# Altium PCB Board.PcbDoc
Units mil, origin at the board's own origin, x right, y up, seen from the top; angles counter-clockwise.
Board outline 4090 x 3385 mil, 4 copper layers (Top Layer, GND, +5V, Bottom Layer), stack 13.956 mil thick; 33 components, 79 nets, 301 pads, 253 vias.
Unrouted connection lines stored in the file: 77.
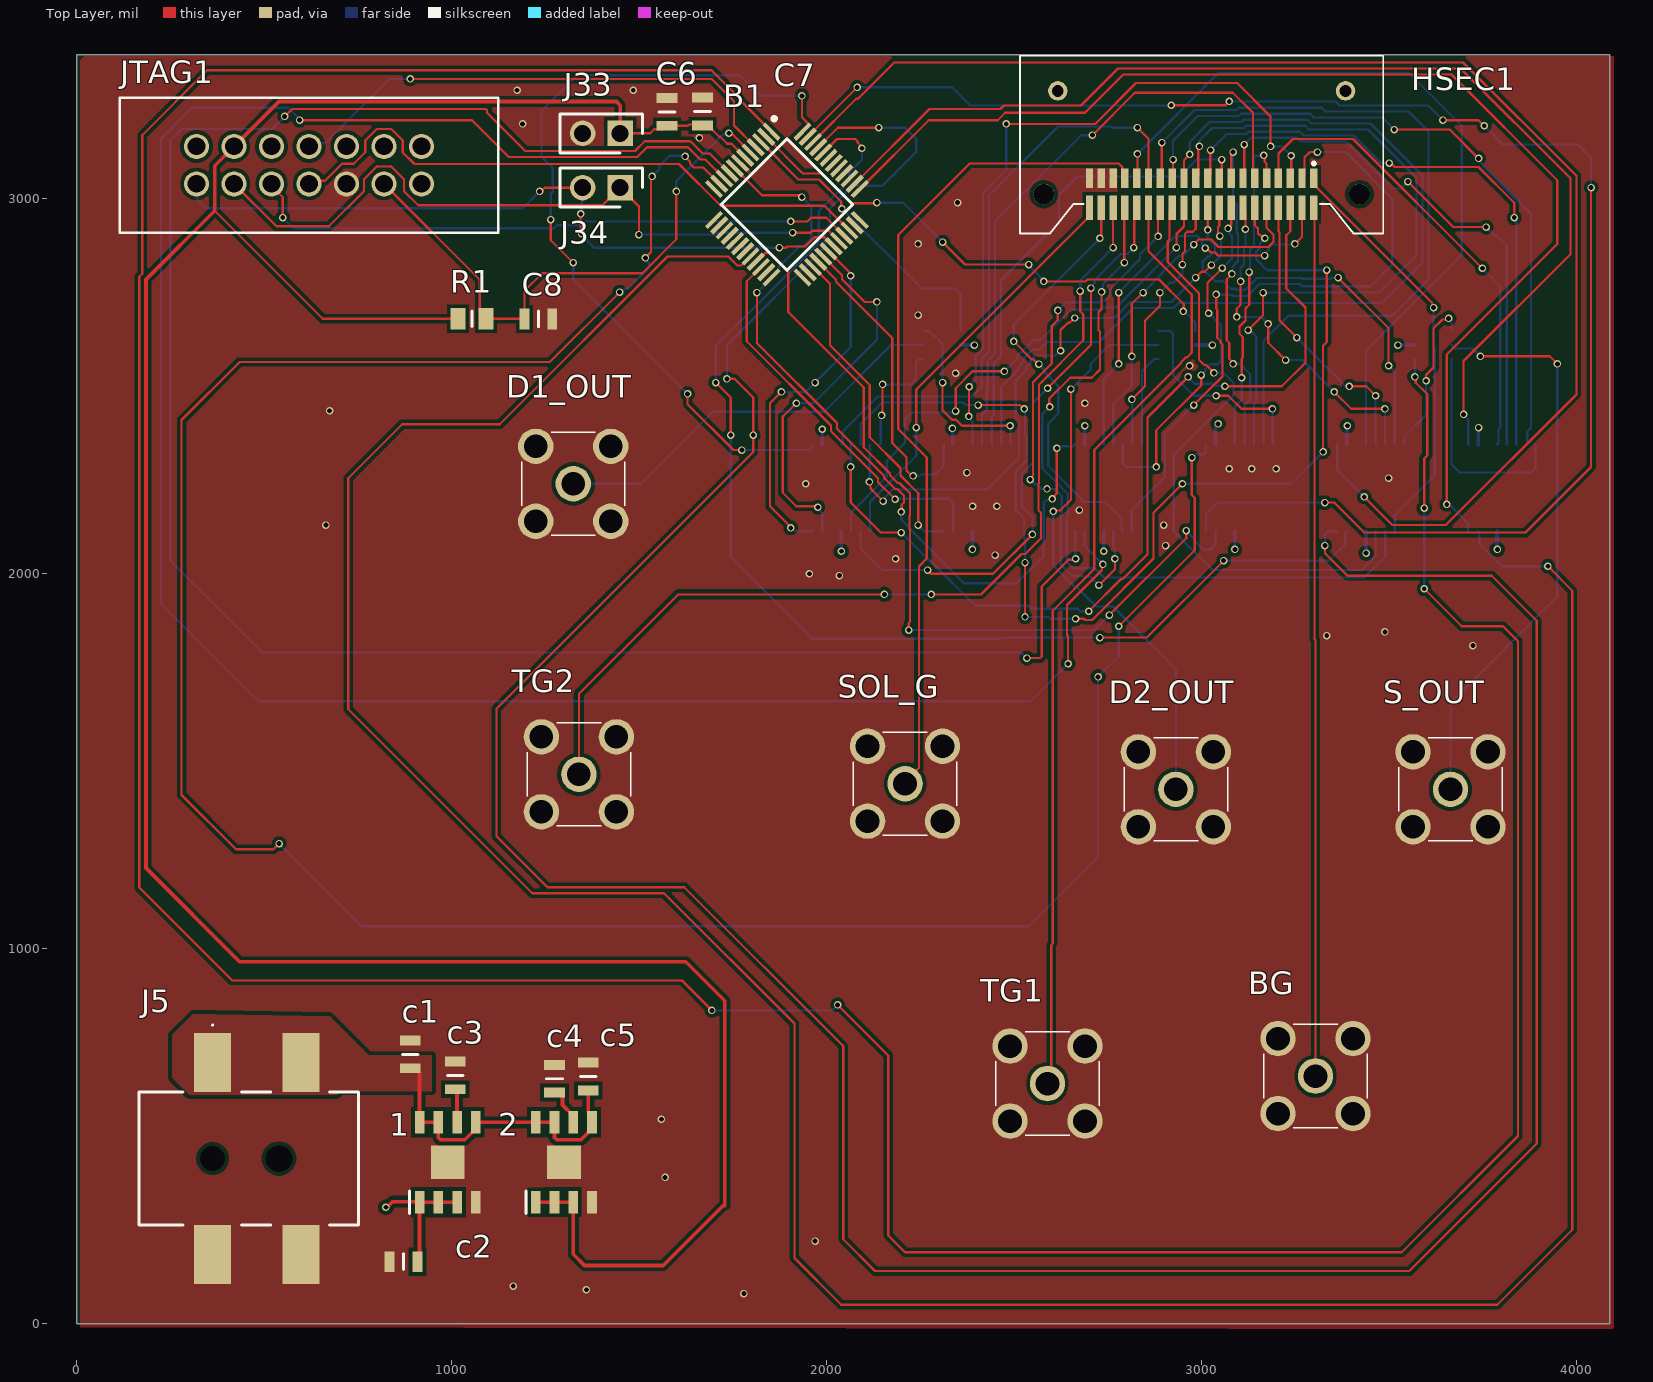
[diagram p0: Top Layer view]
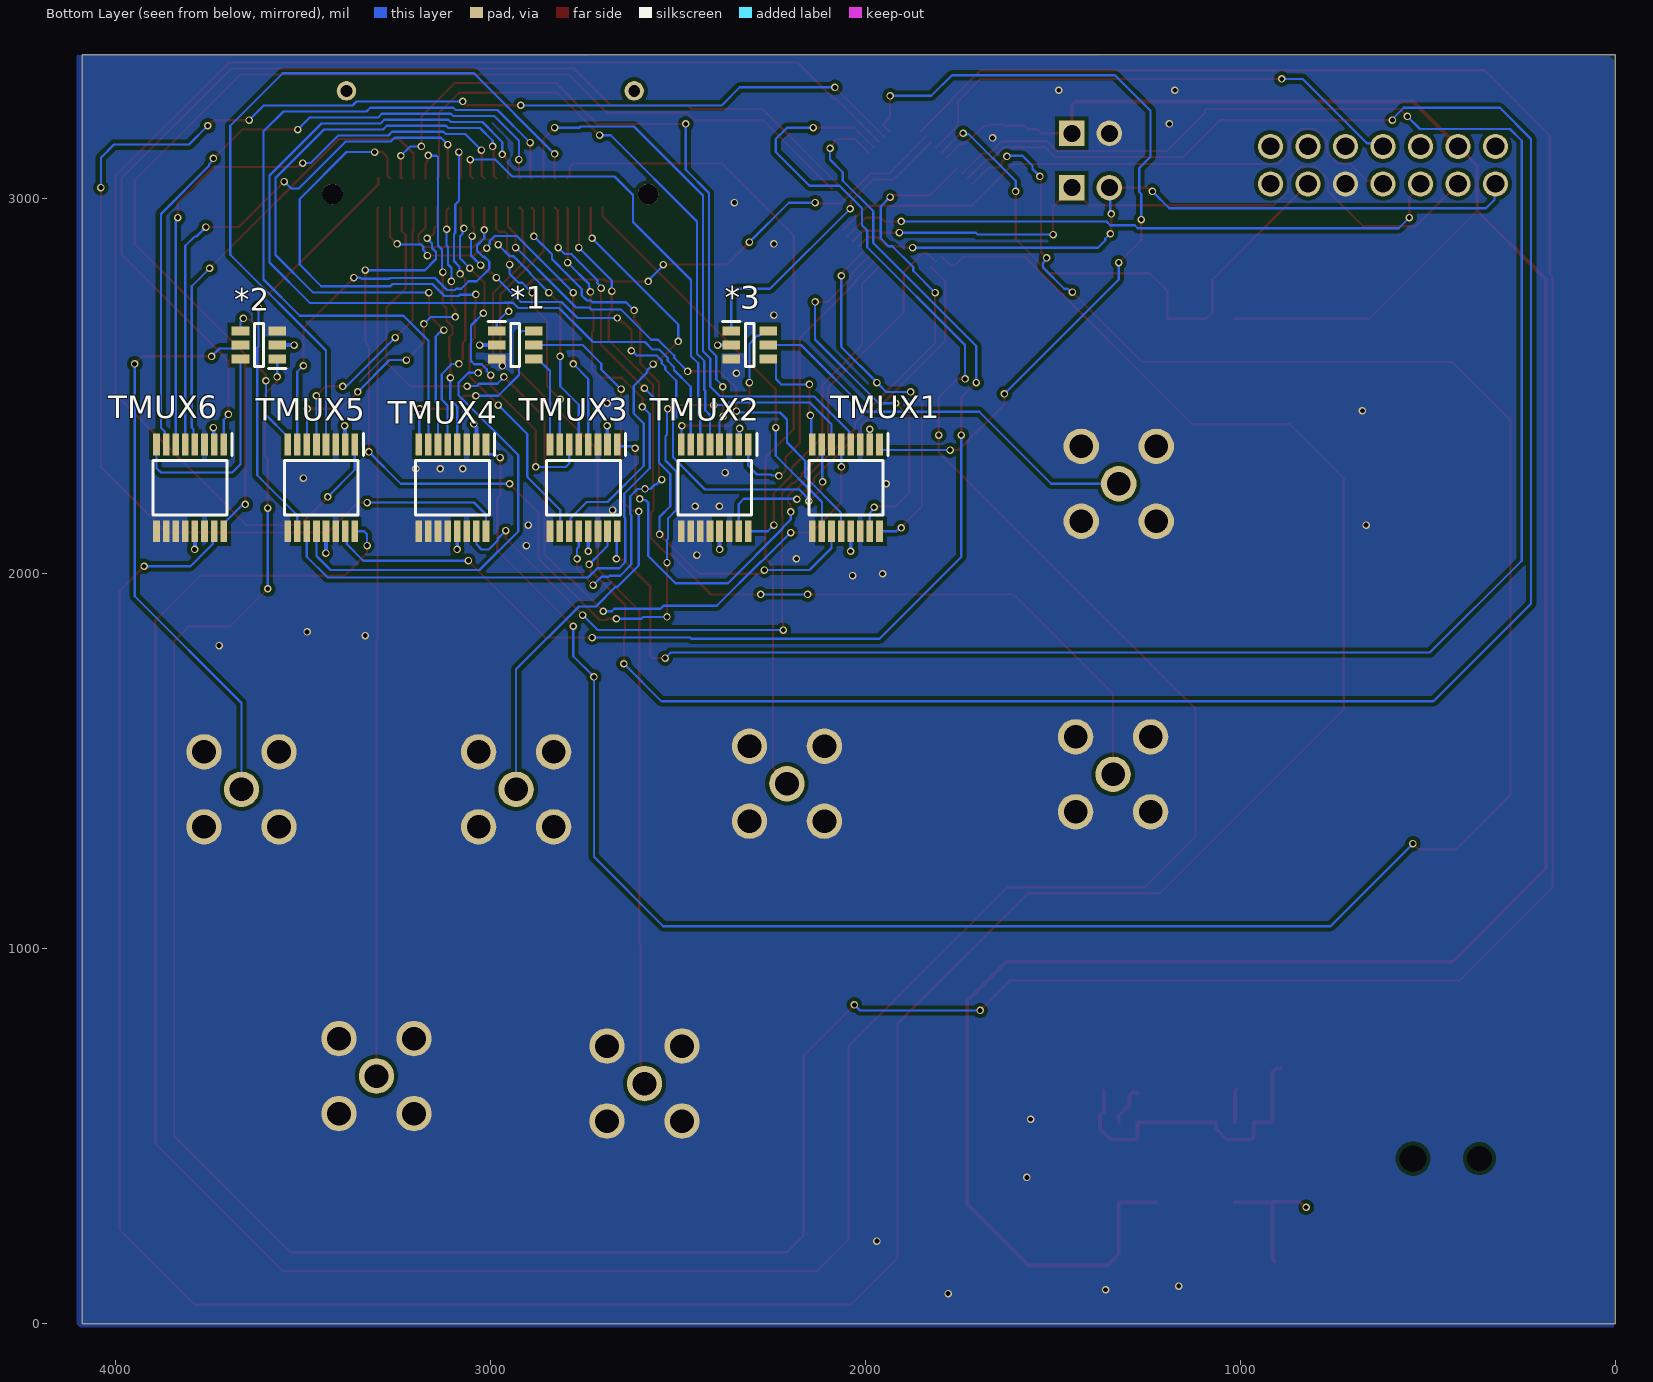
[diagram p1: Bottom Layer view, seen from below]
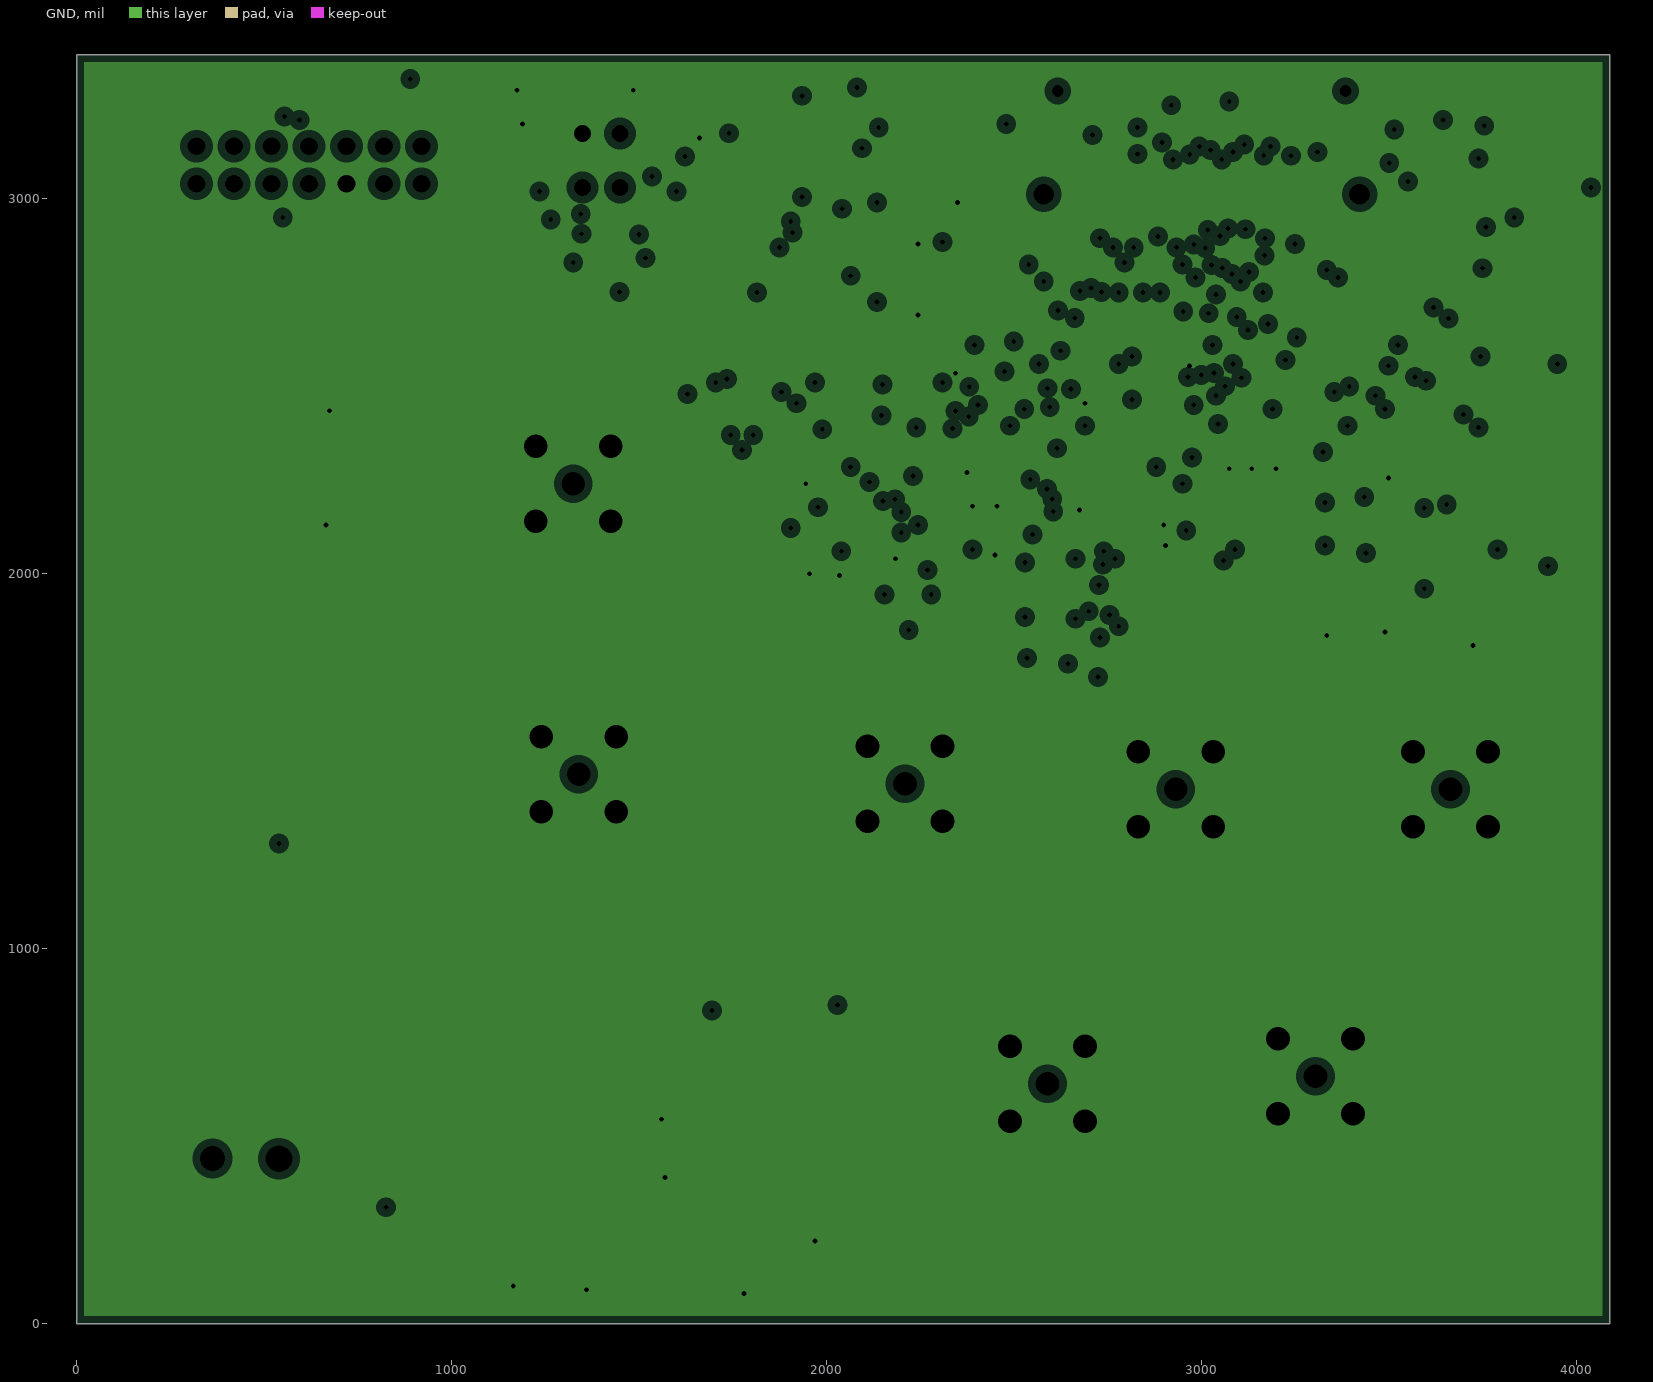
[diagram p2: GND, clearances drawn from the general rule]
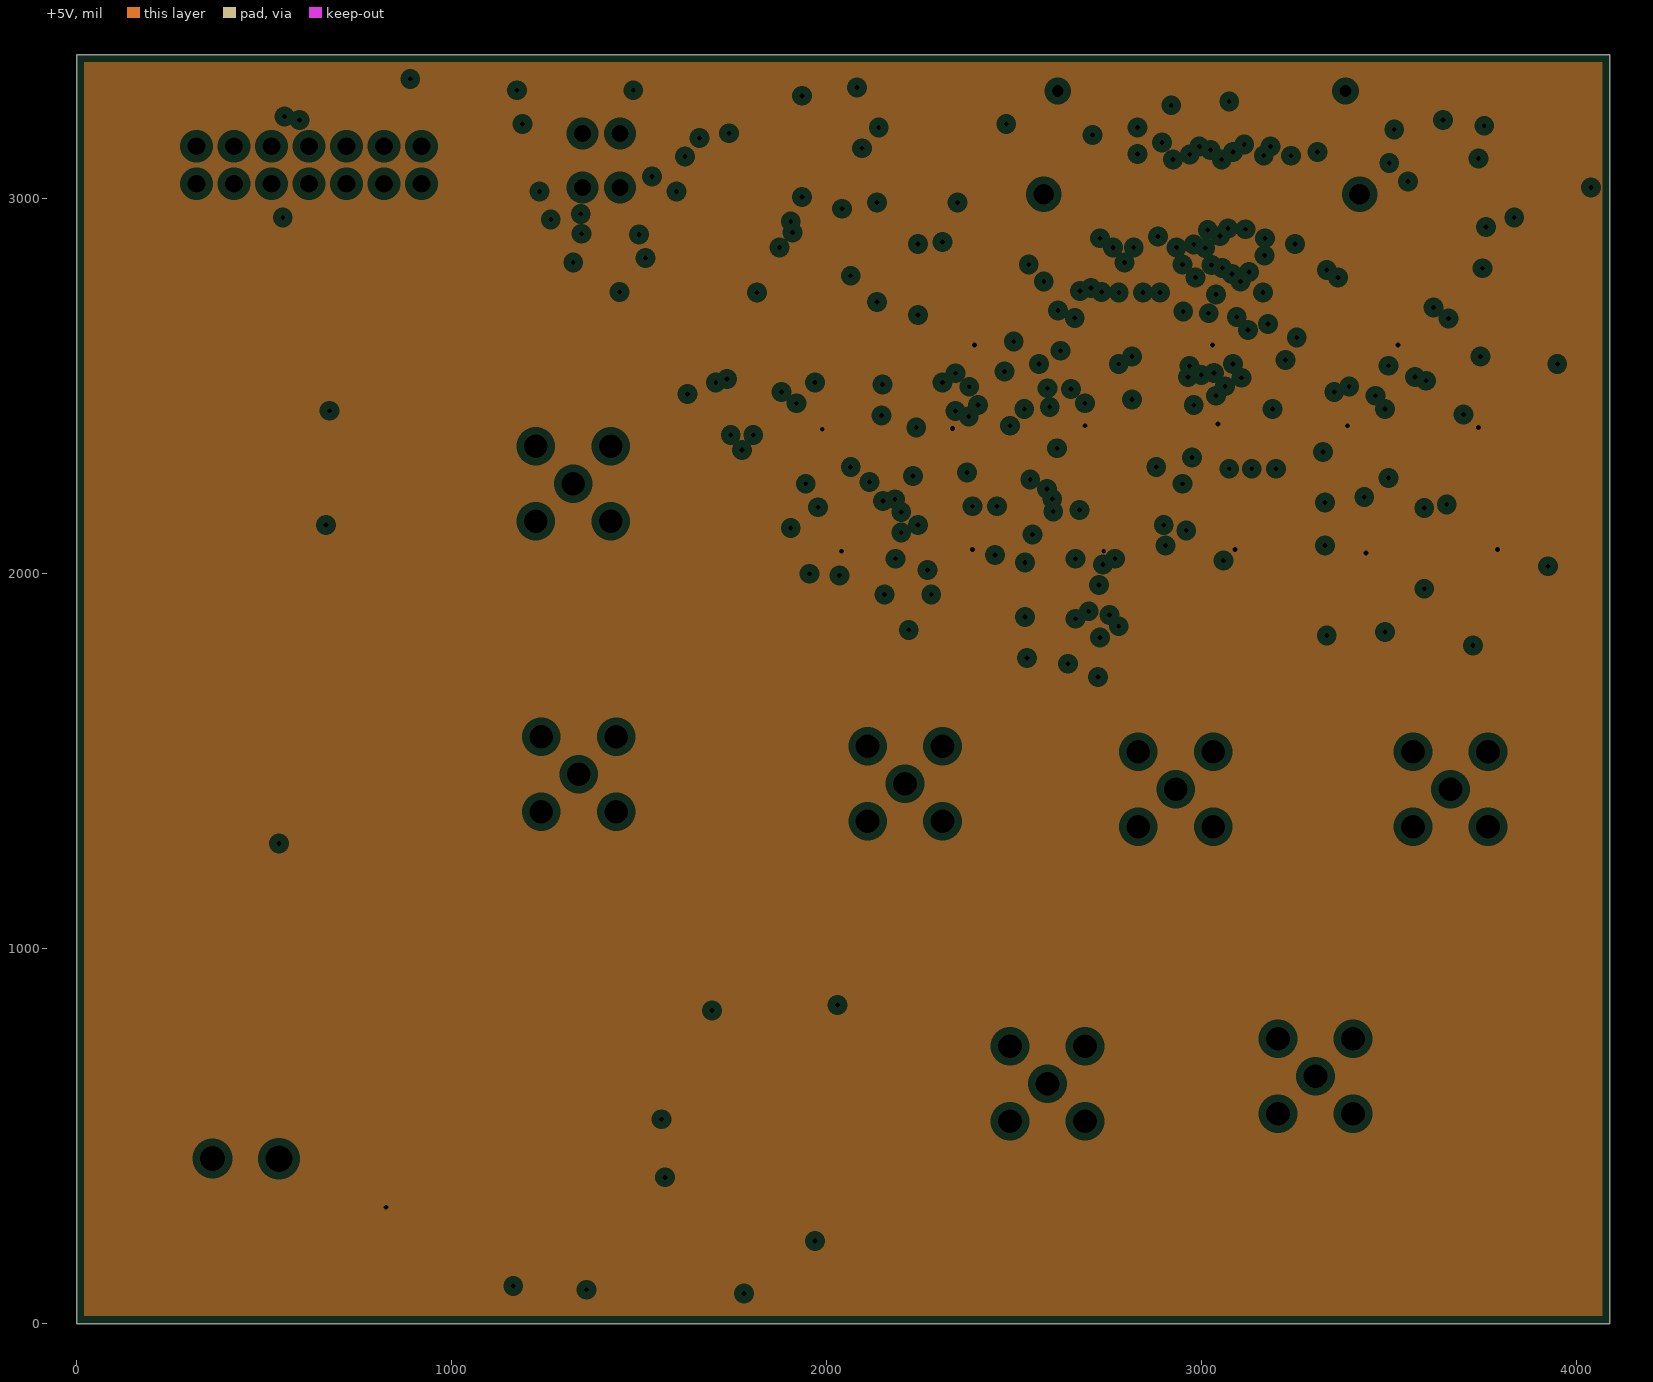
[diagram p3: +5V, clearances drawn from the general rule]

## Layer stack, top to bottom
Top Solder: solder mask 0.4, Solder Resist, Dk 3.5
Top Layer: signal copper 1.4
Dielectric 1: prepreg 2.8, PP-006, Dk 4.1
GND: plane copper 1.378, net GND
Dielectric 2: prepreg 2.8, PP-006, Dk 4.1
+5V: plane copper 1.378, net +5
Dielectric 3: prepreg 2.8, PP-006, Dk 4.1
Bottom Layer: signal copper 1.4
Bottom Solder: solder mask 0.4, Solder Resist, Dk 3.5

## Board outline
0,0 4090,0 4090,3385 0,3385

## Design rules (kind name [scope] priority, off if disabled: settings)
Clearance [All] p1: gap=10 ignorepadtopadclearanceinfootprint=TRUE
MinimumSolderMaskSliver [All] p1: minsoldermaskwidth=2
PlaneClearance [All] p1: clearance=20
PlaneConnect [All] p1: planeconnectstyle=Relief reliefexpansion=20 reliefentries=4 reliefconductorwidth=10 reliefairgap=10
PolygonConnect [All] p1: connectstyle=Direct reliefconductorwidth=10 reliefentries=4 polygonreliefangle="90 Angle" airgapwidth=10
RoutingVias [All] p1: holewidth=1 width=50 viastyle="Through Hole" minholewidth=1 minwidth=1 maxholewidth=100 maxwidth=100
SilkToSolderMaskClearance [IsPad] p1: minsilkscreentomaskgap=3 clearancetoexposedcopper=TRUE
SolderMaskExpansion [All] p1: expansion=4 istentingtop=FALSE
Width [All] p1: maxlimit=10 minlimit=6 preferedwidth=10 minimp=50.000000 maximp=50.000000 favimp=50.000000
26 further rules are at their usual default settings.

## Classes and differential pairs
component class SMA: 1 2 *1 *2 *3 BG c1 c2 c3 c4 c5 D1_OUT D2_OUT HSEC1 J5 S_OUT SOL_G TG1 TG2 TMUX1 TMUX2 TMUX3 TMUX4 TMUX5 TMUX6
component class MCU: B1 C6 C7 C8 J33 J34 JTAG1 R1

## Components (designator, comment, footprint, x,y, rotation, side; value= is the part's Value field where it differs from the comment)
1 "ADP7118ARDZ-5.0-R7" ADP7118ARDZ-5.0-R7 535,245 r90 top
2 "ADP7118ARDZ-3.3-R7" ADP7118ARDZ-5.0-R7 845,245 r90 top
*1 "TMUX1119" TMUX1119DBVR 2765,2705 r180 bottom
*2 "TMUX1119" TMUX1119DBVR 3788.62,2515 r0 bottom
*3 "TMUX1119" TMUX1119DBVR 2139.21,2705 r180 bottom (schematic designator *)
B1 "MSP430FR2355TPT" QFP50P900X900X160-48N 1895,2985 r315 top
BG "SMA-J-P-H-ST-TH1" SMAJPHSTTH1 3305,660 r0 top
c1 "2.2u" 0805X7R106KT1AT -2555,-12482.01 r270 top
c2 "2.2u" 0805X7R106KT1AT 14072.01,-3280 r0 top
c3 "2.2u" 0805X7R106KT1AT -2435,-12537.99 r270 top
c4 "2.2u" 0805X7R106KT1AT -2170,-12547.01 r270 top
c5 "2.2u" 0805X7R106KT1AT -2080,-12540.99 r270 top
C6 "100n" 0805X7R106KT1AT 5020,16432.01 r90 top
C7 "10u" 0805X7R106KT1AT 5115,16432.99 r90 top
C8 "1n" 0805X7R106KT1AT 14432.01,-765 r0 top
D1_OUT "SMA-J-P-H-ST-TH1" SMAJPHSTTH1 1325,2240 r0 top
D2_OUT "SMA-J-P-H-ST-TH1" SMAJPHSTTH1 2932.5,1425 r0 top
HSEC1 "HSEC8-120-01-S-RA-TR" SAMTEC_HSEC8-120-01-L-RA 3001.26,3015.63 r180 top
J5 "PJ-002AH-SMT-TR" PWRPJ 504.29,360 r270 top
J33 "M20-9990246" M20-9990246 1765,2960 r180 top
J34 "M20-9990246" M20-9990246 1765,2815 r180 top
JTAG1 "302-S14" CONN_7024614xx_MOL 320,3040 r0 top
R1 "47k" CR0805-FX-1543ELF 3115,1220 r0 top
S_OUT "SMA-J-P-H-ST-TH1" SMAJPHSTTH1 3665,1425 r0 top
SOL_G "SMA-J-P-H-ST-TH1" SMAJPHSTTH1 2210,1440 r0 top
TG1 "SMA-J-P-H-ST-TH1" SMAJPHSTTH1 2590,640 r0 top
TG2 "SMA-J-P-H-ST-TH1" SMAJPHSTTH1 1340,1465 r0 top
TMUX1 "TMUX1108PWR" TMUX1108PWR 1822.8,2859.33 r270 bottom
TMUX2 "TMUX1108PWR" TMUX1108PWR 2172.68,2859.33 r270 bottom
TMUX3 "TMUX1108PWR" TMUX1108PWR 2522.56,2859.33 r270 bottom
TMUX4 "TMUX1108PWR" TMUX1108PWR 2872.44,2859.33 r270 bottom
TMUX5 "TMUX1108PWR" TMUX1108PWR 3222.32,2859.33 r270 bottom
TMUX6 "TMUX1108PWR" TMUX1108PWR 3572.2,2859.33 r270 bottom

## Footprints (in the part's own frame and the unit in brackets; to place one, negate y for a bottom-side part, rotate by r counter-clockwise, add the part's x,y. Pads: shape width x height; smd on the part's side, far side on the other; paste and mask are expansions set on the pad)
0805X7R106KT1AT [mm]
  rect 0.67x1.41 smd: 1(-336.22,87.503) 2(-334.34,87.503)
  silkscreen extent -335.28,86.97 -335.28,88.04, body extent -336.28,86.87 -334.28,88.14, height 1.13
ADP7118ARDZ-5.0-R7 [mm]
  rect 1.525x0.65 smd: 1(1.987,-9.652) 2(1.987,-10.922) 3(1.987,-12.192) 4(1.987,-13.462) 5(7.411,-13.462) 6(7.411,-12.192) 7(7.411,-10.922) 8(7.411,-9.652)
  rect 2.29x2.29 smd: 9(4.699,-11.557)
  silkscreen extent 1.22,-8.98 2.75,-8.98, body extent 1.7,-13.97 7.7,-9.07, height 0.85
CONN_7024614xx_MOL [mil]
  round 67 / inner round 60 / far side round 67 hole 47 paste-33.5 mask+0: 1(0,0) 2(0,100) 3(100,0) 4(100,100) 5(200,0) 6(200,100) 7(300,0) 8(300,100) 9(400,0) 10(400,100) 11(500,0) 12(500,100) 13(600,0) 14(600,100)
  silkscreen extent -205,-130 805,230, body extent -205,-125 795,225, height 280
CR0805-FX-1543ELF [mm]
  rect 1x1.45 smd: 1(-53.274,37.084) 2(-51.374,37.084)
  silkscreen extent -52.32,36.56 -52.32,37.61, body extent -53.32,36.46 -51.32,37.71, height 0.6
M20-9990246 [mm]
  rect 1.725x1.725 / inner round 1.725 / far side rect 1.725x1.725 hole 1.15: 1(8.001,-5.461)
  round 1.725 hole 1.15: 2(10.541,-5.461)
  silkscreen extent 6.48,-6.78 12.06,-4.14
PWRPJ [mm]
  rect 4x2.5 smd: 1(-8.532,-3.593) 2(4.468,-3.593) 3(4.468,2.407) A1(-8.532,2.407)
  round 0.85 hole 1.7 unplated: MH1(-2.032,-3.593)
  round 0.9 hole 1.8 unplated: MH2(-2.032,0.907)
  silkscreen extent -11.13,-8.59 2.47,6.31, body extent -8.26,-8.49 4.34,6.41, height 10.98
QFP50P900X900X160-48N [mm]
  rect 1.475x0.3 smd: 1(-4.238,2.75) 2(-4.238,2.25) 3(-4.238,1.75) 4(-4.238,1.25) 5(-4.238,0.75) 6(-4.238,0.25) 7(-4.238,-0.25) 8(-4.238,-0.75) 9(-4.238,-1.25) 10(-4.238,-1.75) 11(-4.238,-2.25) 12(-4.238,-2.75) 25(4.238,-2.75) 26(4.238,-2.25) 27(4.238,-1.75) 28(4.238,-1.25) 29(4.238,-0.75) 30(4.238,-0.25) 31(4.238,0.25) 32(4.238,0.75) 33(4.238,1.25) 34(4.238,1.75) 35(4.238,2.25) 36(4.238,2.75)
  rect 0.3x1.475 smd: 13(-2.75,-4.238) 14(-2.25,-4.238) 15(-1.75,-4.238) 16(-1.25,-4.238) 17(-0.75,-4.238) 18(-0.25,-4.238) 19(0.25,-4.238) 20(0.75,-4.238) 21(1.25,-4.238) 22(1.75,-4.238) 23(2.25,-4.238) 24(2.75,-4.238) 37(2.75,4.238) 38(2.25,4.238) 39(1.75,4.238) 40(1.25,4.238) 41(0.75,4.238) 42(0.25,4.238) 43(-0.25,4.238) 44(-0.75,4.238) 45(-1.25,4.238) 46(-1.75,4.238) 47(-2.25,4.238) 48(-2.75,4.238)
  silkscreen extent -4.85,-3.15 3.15,3.62, body extent -4.5,-4.5 4.5,4.5, height 1.6
SAMTEC_HSEC8-120-01-L-RA [mm]
  rect 0.5x1.35 smd: 1(-7.6,-1) 3(-6.8,-1) 5(-6,-1) 7(-5.2,-1) 9(-4.4,-1) 11(-3.6,-1) 13(-2.8,-1) 15(-2,-1) 17(-1.2,-1) 19(-0.4,-1) 21(0.4,-1) 23(1.2,-1) 25(2,-1) 27(2.8,-1) 29(3.6,-1) 31(4.4,-1) 33(5.2,-1) 35(6,-1) 37(6.8,-1) 39(7.6,-1)
  rect 0.5x1.65 smd: 2(-7.6,1) 4(-6.8,1) 6(-6,1) 8(-5.2,1) 10(-4.4,1) 12(-3.6,1) 14(-2.8,1) 16(-2,1) 18(-1.2,1) 20(-0.4,1) 22(0.4,1) 24(1.2,1) 26(2,1) 28(2.8,1) 30(3.6,1) 32(4.4,1) 34(5.2,1) 36(6,1) 38(6.8,1) 40(7.6,1)
  round 1.318 hole 0.81: P1(-9.75,-6.925) P2(9.75,-6.925)
  round 1.4 hole 1.4 unplated: ""(-10.7,0.075) ""(10.7,0.075)
  silkscreen extent -12.3,-9.3 12.3,2.75, body extent -12.3,-9.32 12.3,2.73, height 5.15
SMAJPHSTTH1 [mm]
  round 2.4 hole 1.6: 1(0,0) 2(-2.54,2.54) 3(-2.54,-2.54) 4(2.54,-2.54) 5(2.54,2.54)
  silkscreen extent -3.5,-3.5 3.5,3.5, body extent -3.44,-3.5 3.56,3.5, height 9.55
TMUX1108PWR [mm]
  rect 1.475x0.45 smd: 1(13.064,-3.567) 2(13.064,-4.217) 3(13.064,-4.867) 4(13.064,-5.517) 5(13.064,-6.167) 6(13.064,-6.817) 7(13.064,-7.467) 8(13.064,-8.117) 9(18.94,-8.117) 10(18.94,-7.467) 11(18.94,-6.817) 12(18.94,-6.167) 13(18.94,-5.517) 14(18.94,-4.867) 15(18.94,-4.217) 16(18.94,-3.567)
  silkscreen extent 12.33,-8.34 17.85,-2.99, body extent 12.8,-8.34 19.2,-3.34, height 1.13
TMUX1119DBVR [mm]
  rect 1.2x0.6 smd: 1(-5.568,-1.463) 2(-5.568,-2.413) 3(-5.568,-3.363) 4(-3.068,-3.363) 5(-3.068,-2.413) 6(-3.068,-1.463)
  silkscreen extent -6.17,-3.86 -4.02,-0.81, body extent -5.72,-3.86 -2.92,-0.96, height 1.2

## Part data
2: library part ADP7118ARDZ-5.0-R7
B1: "16-bit Microcontrollers - MCU 24MHz 105C ULP Microcontroller With 32 KB FRAM, 4 KB SRAM, 44 IO, 12-bit ADC, 12-bit DACs, OpAmp/PGA 48-LQFP -40 to 105", Manufacturer_Name="Texas Instruments", Mouser Part Number=595-MSP430FR2355TPT, Datasheet Link=https://datasheet.datasheetarchive.com/originals/distributors/DKDS41/DSANUWW0029426.pdf, Geometry.Height=1.6mm, Manufacturer_Part_Number=MSP430FR2355TPT, Mouser Price/Stock=https://www.mouser.co.uk/ProductDetail/Texas-Instruments/MSP430FR2355TPT?qs=gTYE2QTfZfTjQOKK%2F%2Fw59A%3D%3D
BG D1_OUT D2_OUT S_OUT SOL_G TG1 TG2: "SAMTEC - SMA-J-P-H-ST-TH1 - RF COAXIAL, SMA JACK, 50 OHM, PCB", Manufacturer_Name=SAMTEC, Mouser Part Number=200-SMAJPHSTTH1, Datasheet Link=http://suddendocs.samtec.com/prints/sma-j-p-x-st-th1-mkt.pdf, Geometry.Height=9.55mm, Manufacturer_Part_Number=SMA-J-P-H-ST-TH1, Mouser Price/Stock=https://www.mouser.co.uk/ProductDetail/Samtec/SMA-J-P-H-ST-TH1?qs=bkXRl3BLxbHdaAB2Qwy6zw%3D%3D
c1 c2 c3 c4 c5 C6 C7 C8: library part capacitor
J5: library part Powerinput
JTAG1: library part JTAG
R1: library part resistor

## Via types
v1: diameter 20, hole 13, Top Layer to Bottom Layer, tented both sides, 253 vias

## Nets (pads, with @x,y where several pads share a name; then routed paths per layer and width w, separated by ;. In a path a pad name is that pad's centre, name@x,y a point inside that pad or via, vN(x,y) a via of type N, cw(c..) or ccw(c..) an arc to the next point about the centre after c; other vN are vias at no path point)
3.3V: 2.1 2.2 2.3 B1.6 C6.1 C7.1 J33.1 JTAG1.4 R1.1 | length 7288.5
  Top Layer w6: 368.5,2968.5 657,2680 R1.1 ; J33.1 1530.43,3175 1541.32,3185.88 1565.88,3185.88 C6.1 1630.44,3195 1634.17,3198.73 1667.26,3198.73 C7.1 1684.57,3195.98 1714.49,3166.06 1717,3166.06 1717,3165.47 1735.56,3146.91 1747.01,3146.91 B1.6
  Top Layer w10: 2.1 2.2 2.3 1325,185 1355,155 1565,155 1725,315 1729.14,315 1729.14,860.86 1625,965 435,965 185,1215 185,2785 368.5,2968.5 368.5,3088.5 JTAG1.4 540,3260 1440,3260 1450,3250 J33.1
+5: 1.1 1.2 1.3 *1.2 *2.2 *3.2 c2.2 TMUX1.2 TMUX1.13 TMUX2.2 TMUX2.13 TMUX3.2 TMUX3.13 TMUX4.2 TMUX4.13 TMUX5.2 TMUX5.13 TMUX6.2 TMUX6.13 | length 1086.5
  Top Layer w10: v1(825,310) 827.71,310 842.71,325 913.23,325 1.1 ; c2.2 915,170.98 1.1 ; 1.3 1.2 1.1
  Bottom Layer w10: TMUX1.2 1989.01,2345.19 1989.01,2385.37 v1(1989.21,2385.56) ; v1(2040,2060) TMUX1.13 ; v1(2336.29,2388) 2337.49,2386.79 2337.49,2346.21 TMUX2.2 ; *3.2 v1(2395,2610) ; TMUX2.13 v1(2389.88,2065.12) v1@2390,2065 ; TMUX3.2 2689.29,2345.71 2689.29,2394.29 v1(2690,2395) ; TMUX3.13 2739.88,2113.54 2739.88,2060.12 v1(2740,2060) ; *1.2 v1(3029.89,2609.97) ; TMUX4.2 3038.46,2390.76 3045,2397.29 v1(3045,2400) ; TMUX4.13 3089.65,2065.35 v1(3090,2065) ; TMUX5.2 3389.17,2345.83 3389.17,2394.17 v1(3390,2395) ; TMUX5.13 3439.76,2113.43 3439.76,2055.24 v1(3440,2055) ; v1(3525,2610) *2.2 ; TMUX6.2 3739.11,2345.89 3739.11,2389.11 v1(3740,2390) ; TMUX6.13 3789.41,2065.59 v1(3790,2065)
BG: BG.1 HSEC1.2 | length 2318.1
  Top Layer w6: HSEC1.2 3302,2974.73 3302,1825.33 3305,1822.33 BG.1
D1-1: HSEC1.29 TMUX1.4 | length 1594.8
  Top Layer w6: v1(2830,3190) 2859.53,3160.47 HSEC1.29
  Bottom Layer w6: TMUX1.4 2043.73,2348.73 2043.73,2379.42 2137.31,2473 2388.05,2473 2414.71,2499.66 2414.71,2574.56 2434,2593.85 2434,3009 2618,3193 2760.5,3193 2763.5,3190 v1(2830,3190)
D1-2: HSEC1.4 TMUX3.4 | length 1106.7
  Top Layer w6: v1(2780,2560) 2780,2750 v1(2780.14,2750.14) ; v1(3010.91,2868.6) 3014.49,2868.6 3026.13,2856.95 3036.95,2856.95 3044.9,2849 v1(3169.36,2849) ; v1(3250,2880) 3268.98,2898.98 HSEC1.4
  Bottom Layer w6: TMUX3.4 2739.76,2519.76 v1(2780,2560) ; v1(2780.14,2750.14) 2931,2901 2989.53,2901 3003,2887.53 3003,2880.29 3010.91,2872.39 v1(3010.91,2868.6) ; v1(3169.36,2849) 3169.36,2852.79 3180.53,2863.95 3180.53,2873 3186.21,2878.68 3248.68,2878.68 v1(3250,2880)
D1_OUT: *3.5 D1_OUT.1 | length 1088.3
  Bottom Layer w6: D1_OUT.1 1505,2240 1697,2432 1994.63,2432 2172.63,2610 *3.5
D2-1: HSEC1.6 TMUX1.5 | length 2436.3
  Top Layer w6: v1(2065,2285) 2065,2190 2145,2110 v1(2200,2110) ; v1(2699.9,1899.95) 2786.05,1986.1 2791.1,1986.1 2857,2052 2857,2417 v1(2965,2525) ; v1(3063.15,2500.14) 3063.29,2500 3215,2500 3278,2563 3278,2710.19 3227,2761.19 3227,2903.39 3237.48,2913.87 HSEC1.6
  Bottom Layer w6: v1(2065,2285) 2065.3,2285.3 2065.3,2344.7 TMUX1.5 ; v1(2200,2110) 2277,2033 2279.53,2033 2397.53,1915 2539.29,1915 2547.29,1907 2670.53,1907 2677.58,1899.95 v1(2699.9,1899.95) ; v1(2965,2525) 2983,2507 3030.63,2507 3036.49,2501.14 3062.15,2501.14 v1(3063.15,2500.14)
D2-2: HSEC1.10 TMUX3.5 | length 958.2
  Top Layer w6: v1(2815,2580) 2815,2720 v1(2845,2750) ; v1(2980,2878) 2993.6,2891.6 3026.88,2891.6 3046.47,2872 3179.53,2872 3193,2885.47 3193,2904.53 3174.49,2923.04 HSEC1.10
  Bottom Layer w6: TMUX3.5 2765.35,2450.69 2815,2500.34 v1(2815,2580) ; v1(2845,2750) 2895.02,2800.02 2895.02,2802.44 2939.58,2847 2943.53,2847 2944.47,2847.95 2949.95,2847.95 v1(2980,2878)
D2_OUT: *1.5 D2_OUT.1 | length 1552.2
  Top Layer w6: v1(2605.35,2166.44) 2608.03,2169.12 2624.12,2169.12 2652.58,2197.58 v1(2652.58,2492.42)
  Bottom Layer w6: v1(2605.35,2166.44) 2605.35,2021.87 2662.11,1965.11 2667.26,1965.11 2719.37,1913 2764.53,1913 2932.5,1745.03 D2_OUT.1 ; v1(2652.58,2492.42) 2705.13,2544.97 2705.13,2560.13 2755,2610 *1.5
D3-1: HSEC1.12 TMUX1.6 | length 3008.2
  Top Layer w6: v1(2405,2450) 2516.21,2450 2526.21,2440 v1(2528.05,2440) ; v1(2530,1885) v1(2530,2030) ; v1(2665,1880) 2687.32,1880 2690.37,1876.95 2709.42,1876.95 2873,2040.53 2873,2163 v1(2950,2240) ; HSEC1.12 3142.99,2930 3151.65,2921.35 3151.65,2907.76 3155.16,2904.24 3156.97,2904.24 3166.21,2895 v1(3170,2895) ; v1(3325,2325) 3325,2608.11 3335,2618.11 v1(3335,2810)
  Bottom Layer w6: TMUX1.6 2091.18,2398.71 2149.47,2457 2364.84,2457 2371.84,2450 v1(2405,2450) ; v1(2528.05,2440) 2530.1,2437.95 2530.1,2371 2534,2367.1 2534,2301.99 2505.05,2273.04 2505.05,2170.05 2527,2148.1 2527,2093.78 2530,2090.78 v1(2530,2030) ; v1(2530,1885) 2593.66,1885 2598.66,1880 v1(2665,1880) ; v1(2950,2240) 3240,2240 v1(3325,2325) ; v1(3170,2895) 3170,2894.13 3157,2881.13 3157,2869.16 3146.36,2858.53 3146.36,2839.47 3175.84,2810 v1(3335,2810)
D3-2: HSEC1.16 TMUX3.6 | length 967.9
  Top Layer w6: v1(2880,2285) 2880,2382.53 3000,2502.53 v1(3000,2530) ; v1(3020,2695) 3017,2698 3017,2776.1 v1(3056.19,2815.29) ; v1(3072,2921.4) 3072,2923.79 3080,2931.79 HSEC1.16
  Bottom Layer w6: TMUX3.6 2790.94,2294.06 2800,2285 v1(2880,2285) ; v1(3000,2530) 3000.46,2530 3010.98,2540.51 3010.98,2545.55 3024.45,2559.02 3044.02,2559.02 3052.89,2567.89 3052.89,2662.11 v1(3020,2695) ; v1(3056.19,2815.29) 3082.36,2841.46 3082.36,2899.74 3074.68,2907.42 3074.68,2918.72 v1(3072,2921.4)
D4-1: HSEC1.18 TMUX1.7 | length 1648.4
  Top Layer w6: v1(2115,2245) 2117.68,2242.32 2117.68,2227.32 2135.78,2209.22 v1(2151.34,2193.66) ; v1(2625,2595) 2625,2650 2644.44,2669.44 2648.69,2669.44 2661.55,2682.3 v1(2662.7,2682.3) ; v1(2985,2790) 3000.89,2805.89 3009.6,2805.89 v1(3027.38,2823.67) ; HSEC1.18 3048.5,2928.5 3045,2925 3045,2906 v1(3050,2901)
  Bottom Layer w6: v1(2115,2245) 2115.89,2245.89 2115.89,2344.11 TMUX1.7 ; v1(2151.34,2193.66) 2151.34,2197.45 2160.69,2206.79 2160.69,2208.21 2177.47,2225 2428.52,2225 2514.1,2310.58 2514.1,2408.21 2505.05,2417.26 2505.05,2514.9 2534.75,2544.6 2534.75,2552.12 2543.97,2561.34 2543.97,2569.08 2557.45,2582.55 2610.58,2582.55 2623.02,2595 v1(2625,2595) ; v1(2662.7,2682.3) 2768.93,2682.3 2811.63,2725 2920,2725 v1(2985,2790) ; v1(3027.38,2823.67) 3052.59,2848.87 3052.59,2898.41 v1(3050,2901)
D4-2: HSEC1.22 TMUX3.7 | length 717.2
  Top Layer w6: v1(2815,2465) 2850,2500 2850,2675 2890,2715 v1(2890,2750) ; v1(2950.05,2824.95) 2950.05,2853.53 2957,2860.47 2957,2907 2962.68,2912.68 2977.68,2912.68 2985.51,2920.51 HSEC1.22
  Bottom Layer w6: v1(2815,2465) 2815.77,2464.23 2815.77,2345.77 TMUX3.7 ; v1(2890,2750) 2916.34,2776.34 2926.34,2776.34 2950,2800 2950,2824.89 v1(2950.05,2824.95)
D5-1: HSEC1.24 TMUX1.12 | length 1425
  Top Layer w6: v1(2345,2434) 2345,2495 2390,2540 v1(2475,2540) ; v1(2934,2870) 2934,2906.63 2954.02,2926.64 HSEC1.24
  Bottom Layer w6: TMUX1.12 2065.59,2163.06 2161,2258.47 2161,2300.9 2210,2349.9 2210,2411.49 2228.51,2430 2335,2430 2339,2434 v1(2345,2434) ; v1(2475,2540) 2510.93,2575.93 2510.93,2581.3 2553.98,2624.34 2572.21,2624.34 2653.17,2705.3 2732.93,2705.3 2737.63,2710 2772.53,2710 2822,2759.47 2822,2759.53 2932.47,2870 v1(2934,2870)
D5-2: HSEC1.28 TMUX3.12 | length 1501.7
  Top Layer w6: v1(2544.05,2251.21) 2544.05,2254.73 2551.05,2261.73 2551.05,2511.1 2601.16,2561.21 2601.16,2661.16 2617.67,2677.67 v1(2617.67,2702.33) ; v1(2727.31,1969.69) 2770,2012.37 v1(2770,2040) ; v1(2885,2900) 2885,2970.24 HSEC1.28
  Bottom Layer w6: v1(2544.05,2251.21) 2544.55,2251.21 2557.73,2238.02 2561.98,2238.02 2573.79,2226.21 v1(2588.69,2226.21) 2608.86,2226.21 2628.35,2206.72 2628.35,2157.93 2625.13,2154.71 2625.13,2024.71 2654.85,1995 2683,1995 2686,1992 2705,1992 v1(2727.31,1969.69) ; v1(2617.67,2702.33) 2639.34,2724 2729,2724 2733.86,2728.86 2743.67,2728.86 2757.14,2742.34 2757.14,2759.67 2793.11,2795.63 2793.16,2795.63 2837.03,2839.5 2837.03,2852.03 v1(2885,2900) ; TMUX3.12 2765.35,2071.24 2770,2066.59 v1(2770,2040)
D6-1: HSEC1.32 TMUX1.11 | length 1596.3
  Top Layer w6: v1(2270,2010) 2280,2000 2444.85,2000 2549.85,2105 v1(2550,2105) ; v1(2590.05,2494.95) 2706,2610.9 v1(2706,2762.26) ; v1(2820,2870) 2821.19,2871.19 2821.19,2969.42 HSEC1.32
  Bottom Layer w6: TMUX1.11 2091.18,2068.82 2150,2010 v1(2270,2010) ; v1(2550,2105) 2550,2151.23 2521.05,2180.18 2521.05,2266.41 2551.05,2296.41 2551.05,2455.95 v1(2590.05,2494.95) ; v1(2706,2762.26) 2706,2766.05 2715.92,2775.98 2715.92,2783.45 2785.47,2853 2803,2853 v1(2820,2870)
D6-2: HSEC1.38 TMUX3.11 | length 1128.2
  Top Layer w6: v1(2500,2620) 2548.15,2571.85 2552.4,2571.85 2564.69,2559.55 v1(2566.97,2559.55) ; v1(2730,2895) 2733.54,2898.54 HSEC1.38
  Bottom Layer w6: 2500,2630 2500,2665 v1(2730,2895) ; v1(2566.97,2559.55) 2566.97,2558.15 2583.14,2541.98 2583.14,2536.86 2619,2501 2619,2427.74 2592,2400.74 2592,2288.33 2688.79,2191.54 2743.75,2191.54 2787.21,2148.08 2787.21,2117.39 TMUX3.11
D7-1: HSEC1.40 TMUX1.10 | length 1108.1
  Top Layer w6: v1(2240,2390) 2240,2491.57 2702.05,2953.62 HSEC1.40
  Bottom Layer w6: TMUX1.10 2120.5,2117.39 2116.77,2121.13 2116.77,2191.62 2240,2314.85 v1(2240,2390)
D7-2: HSEC1.3 TMUX3.10 | length 1776.4
  Top Layer w6: v1(2980,2450) 3037.64,2507.64 3038.13,2507.64 3056.98,2526.49 3056.98,2611.42 3051.97,2616.43 3051.97,2620.56 3043,2629.53 3043,2704.53 3040,2707.53 v1(3040,2745) ; HSEC1.3 3275.82,3061.84 3275.82,3110.82 3290,3125 v1(3310,3125)
  Bottom Layer w6: TMUX3.10 2815,2115.2 2815,2170 2903,2258 2903,2373 v1(2980,2450) ; v1(3040,2745) 3041,2744 3082.63,2744 3085.63,2741 3123.47,2741 3155.47,2773 3262,2773 3268,2767 3452,2767 3510,2825 3510,3000 3385,3125 v1(3310,3125)
D8-1: HSEC1.5 TMUX2.4 | length 1893.9
  Top Layer w6: v1(2380,2420) 2380.63,2420.63 2380.63,2498.1 v1(2381.26,2498.74) ; v1(2480,3200) 2717.37,3200 2826.37,3309 3096,3309 3185,3220 v1(3185,3140) ; HSEC1.5 3240,3057.52 v1(3240,3115)
  Bottom Layer w6: v1(2380,2420) 2380,2416.21 2389.88,2406.33 TMUX2.4 ; v1(2381.26,2498.74) 2381.26,2501.26 2398.71,2518.71 2398.71,2581.18 2418,2600.47 2418,3015.63 2480,3077.63 v1(2480,3200) ; v1(3185,3140) 3215,3140 v1(3240,3115)
D8-2: HSEC1.9 TMUX4.4 | length 886.7
  Top Layer w6: v1(3108,2523) 3108,2574.54 3111,2577.54 3111,2631.85 3102.22,2640.64 3102.22,2659.69 3118,2675.47 3118,2707.84 3128,2717.84 v1(3128,2805) ; v1(3167,3116) 3169.68,3113.32 3169.68,3098.81 3174.49,3094 HSEC1.9
  Bottom Layer w6: TMUX4.4 3089.82,2345.18 3089.82,2446.26 3108,2464.44 v1(3108,2523) ; v1(3128,2805) 3130.36,2807.36 3130.36,2865.15 3141,2875.79 3141,3111 3145,3115 3166,3115 v1(3167,3116)
D9-1: HSEC1.11 TMUX2.5 | length 1638.1
  Top Layer w6: v1(2710,3170) 2823,3283 3084.53,3283 3138,3229.53 3138,3059.99 HSEC1.11
  Bottom Layer w6: TMUX2.5 2415.47,2423.39 2428,2435.92 2428,2488.28 2430.71,2490.99 2430.71,2567.93 2450,2587.22 2450,2940.04 2679.96,3170 v1(2710,3170)
D9-2: HSEC1.15 TMUX4.5 | length 913.7
  Top Layer w6: HSEC1.15 3080,3120 v1(3085,3125) ; v1(3082,2800) 3067.97,2785.97 3067.97,2623.06 3075.14,2615.88 3075.14,2573.64 3085,2563.79 v1(3085,2560)
  Bottom Layer w6: v1(3082,2800) 3083.23,2801.23 3083.23,2819 3098.36,2834.13 3098.36,2906.36 3095,2909.73 3095,2985.29 3085,2995.29 v1(3085,3125) ; v1(3085,2560) 3085.47,2559.53 3104,2559.53 3131,2532.53 3131,2464.81 3115.24,2449.05 TMUX4.5
D10-1: HSEC1.17 TMUX2.6 | length 1266.2
  Top Layer w6: HSEC1.17 3055,3061.5 v1(3055,3105)
  Bottom Layer w6: TMUX2.6 2441.06,2417.91 2446.71,2423.56 2446.71,2561.3 2466,2580.59 2466,2783.53 2620.56,2938.09 2620.56,3010.56 2670,3060 2943.09,3060 2988.09,3105 v1(3055,3105)
D10-2: HSEC1.21 TMUX4.6 | length 1849.5
  Top Layer w6: HSEC1.21 2992.35,3061.84 2992.35,3137.35 v1(2995,3140) ; v1(3125.22,2650.16) 3165,2689.95 v1(3165,2750)
  Bottom Layer w6: v1(2995,3140) 2995,3155 3029,3189 3113.75,3189 3119.75,3195 3277.4,3195 3287.08,3185.32 3444.73,3185.32 3574.26,3055.79 3574.26,2850.26 3474,2750 v1(3165,2750) ; v1(3125.22,2650.16) 3129,2650.16 3135.77,2643.4 3136.58,2643.4 3147,2632.98 3147,2458.18 3140.83,2452.01 TMUX4.6
D11-1: HSEC1.23 TMUX2.7 | length 2467.1
  Top Layer w6: HSEC1.23 2954.02,3103.45 v1(2969.35,3118.79)
  Bottom Layer w6: TMUX2.7 2466.65,2499.13 2511.27,2543.74 2511.27,2551.26 2527.97,2567.96 2527.97,2575.71 2550.82,2598.55 2569.04,2598.55 2588.49,2618 2727.25,2618 2818.25,2709 2926.63,2709 2940.63,2723 2964.53,2723 2965.53,2722 3482,2722 3590.26,2830.26 3590.26,3062.42 3451.36,3201.32 3293.7,3201.32 3284.03,3211 3113.12,3211 3107.12,3205 3022.37,3205 2969.35,3151.98 v1(2969.35,3118.79)
D11-2: HSEC1.27 TMUX4.7 | length 2051.8
  Top Layer w6: HSEC1.27 2895,3058.98 v1(2895,3150)
  Bottom Layer w6: v1(2895,3150) 2982,3237 3093.86,3237 3099.86,3243 3321.67,3243 3331.35,3233.32 3553.16,3233.32 3606.26,3180.22 3606.26,2784.85 3509.63,2688.21 3233.21,2688.21 3166.42,2621.42 TMUX4.7
GND: 1.4 1.9 2.4 2.9 *1.3 *2.3 *3.3 B1.7 BG.2 BG.3 BG.4 BG.5 c1.1 c2.1 c3.1 c4.1 c5.1 C6.2 C7.2 C8.2 D1_OUT.2 D1_OUT.3 D1_OUT.4 D1_OUT.5 D2_OUT.2 D2_OUT.3 D2_OUT.4 D2_OUT.5 HSEC1.35 HSEC1.37 HSEC1.39 J5.2 J5.3 J33.2 JTAG1.9 S_OUT.2 S_OUT.3 S_OUT.4 S_OUT.5 SOL_G.2 SOL_G.3 SOL_G.4 SOL_G.5 TG1.2 TG1.3 TG1.4 TG1.5 TG2.2 TG2.3 TG2.4 TG2.5 TMUX1.3 TMUX1.9 TMUX1.14 TMUX2.3 TMUX2.9 TMUX2.10 TMUX2.11 TMUX2.12 TMUX2.14 TMUX3.3 TMUX3.9 TMUX3.14 TMUX4.3 TMUX4.9 TMUX4.10 TMUX4.11 TMUX4.12 TMUX4.14 TMUX5.3 TMUX5.9 TMUX5.14 TMUX6.3 TMUX6.9 TMUX6.10 TMUX6.11 TMUX6.12 TMUX6.14
  other v1: 1780,80 1360,90 1165,100 1970,220 1570,390 1560,545 3724.82,1808.46 3335,1835 3490,1845 2035,1995 1955,2000 2185,2040 2450,2050 2905,2075 665,2130 2900,2130 2675,2170 2390,2180 2455,2180 1945,2240 3500,2255 2375,2270 3075,2280 3135,2280 3200,2280 675,2435 2690,2455 2345,2535 2969.26,2554.7 2245,2690 2245,2880 2350,2990 1661.48,3162.8 1190,3200 1175,3290 1485,3290
Net1_5: 1.5 1.7 1.8 2.5 2.7 2.8 c1.2 c5.2 J5.1 J5.A1 | length 857.9
  Top Layer w10: c1.2 904.57,680.98 915,670.55 1.8 1.7 965,495.94 970.86,490.08 1035.53,490.08 1065,519.55 1.5 2.8 2.7 1275,495.94 1280.86,490.08 1345.53,490.08 1375,519.55 2.5 1375,554 1365,564 c5.2
Net1_6: 1.6 c3.2 | length 90.3
  Top Layer w10: c3.2 1015,620 1.6
Net2_6: 2.6 c4.2 | length 107.5
  Top Layer w10: c4.2 1288.01,615.98 1296.2,607.8 1296.2,582.8 1325,554 2.6
Net*1_1: *1.1 B1.2 | length 1394.5
  Top Layer w6: B1.2 1937.31,3067.96 1987.19,3067.96 2066.44,2988.72 2133.72,2988.72 v1(2135,2990) ; v1(2310,2885) 2370,2825 v1(2540,2825) ; v1(2580,2780) 2691.21,2780 2696.47,2785.26 2887.26,2785.26 2953.53,2719 2953.53,2701.53 v1(2952,2700)
  Bottom Layer w6: v1(2135,2990) 2205,2990 v1(2310,2885) ; v1(2540,2825) 2540,2822.5 2580,2782.5 v1(2580,2780) ; v1(2952,2700) 2955,2700 2984.21,2670.79 *1.1
Net*1_4: *1.4 TMUX3.8 | length 252.6
  Bottom Layer w6: TMUX3.8 2842.13,2540.75 2873.98,2572.6 *1.4
Net*1_6: *1.6 TMUX4.8 | length 550.4
  Top Layer w6: v1(3040,2475) 3072.47,2475 3107.47,2440 v1(3190,2440)
  Bottom Layer w6: *1.6 2917.6,2647.4 2925,2640 2925,2530 2980,2475 v1(3040,2475) ; v1(3190,2440) 3191,2439 3191,2346 TMUX4.8
Net*2_1: *2.1 B1.1 | length 10591.4
  Top Layer w6: v1(1695,835) 1615,915 415,915 167,1163 167,2792.46 175,2800.46 175,3170 348,3343 1693.96,3343 1769.55,3267.41 1769.55,3263.56 B1.1 ; v1(2030,850) 2165,715 2165,235 2210,190 3535,190 3845,500 3845,1820 3805,1860 3695,1860 v1(3595,1960) ; v1(3570,2525) 3572.68,2522.32 3572.68,2509.79 3603,2479.47 3603,2315.66 3595,2307.66 v1(3595,2175)
  Bottom Layer w6: v1(1695,835) 2015,835 v1(2030,850) ; *2.1 3570,2572.01 v1(3570,2525) ; v1(3595,1960) v1(3595,2175)
Net*2_4: *2.4 TMUX5.8 | length 430.3
  Top Layer w6: v1(3600,2515) 3600,2530 3620,2550 3620,2655 3643.53,2678.53 3657.32,2678.53 v1(3660,2681.21)
  Bottom Layer w6: TMUX5.8 3541.89,2365.18 3600,2423.29 v1(3600,2515) ; v1(3660,2681.21) 3667.84,2673.38 *2.4
Net*2_6: *2.6 TMUX6.8 | length 581.7
  Bottom Layer w6: *2.6 3667.84,2292.16 3690,2270 3880,2270 3891.77,2281.77 TMUX6.8
Net*_1: *3.1 B1.3 | length 809.9
  Top Layer w6: B1.3 1925.47,3051.96 1980.56,3051.96 2039.87,2992.66 2039.87,2975.13 v1(2041.34,2973.66)
  Bottom Layer w6: v1(2041.34,2973.66) 2255,2760 2345,2760 2358.43,2746.57 *3.1
Net*_4: *3.4 TMUX1.8 | length 330.7
  Top Layer w6: v1@2145,2420 v1(2147.5,2422.5) 2150,2425 v1(2150,2505)
  Bottom Layer w6: TMUX1.8 2144.93,2347.57 2144.93,2419.93 v1(2147.5,2422.5) ; v1(2150,2505) 2225,2505 2239.38,2519.38 2239.38,2563.79 2248.19,2572.6 *3.4
Net*_6: *3.6 TMUX2.8 | length 489.4
  Top Layer w6: v1(2310,2510) 2310,2436.47 2335.47,2411 2345.81,2411 2361.81,2395 v1(2490,2395)
  Bottom Layer w6: *3.6 2271.81,2647.4 2284.4,2634.81 2289.01,2634.81 2310,2613.82 v1(2310,2510) ; v1(2490,2395) 2491.12,2393.88 2491.12,2346.12 TMUX2.8
NetB1_4: B1.4 JTAG1.8 | length 1379.8
  Top Layer w6: v1(890,3320) 1694.33,3320 1753.55,3260.78 1753.55,3196.05 B1.4
  Bottom Layer w6: JTAG1.8 628.26,3148.26 662.5,3148.26 834.24,3320 v1(890,3320)
NetB1_5: B1.5 C8.1 JTAG1.11 R1.2 | length 1539.2
  Top Layer w6: JTAG1.11 1075.72,2784.28 1075.72,2696.69 R1.2 C8.1 1195,2755 1242,2802 1509.37,2802 1600,2892.63 v1(1600,3020) ; v1(1740,3175) 1742.68,3172.32 1749.44,3172.32 B1.5
  Bottom Layer w6: v1(1600,3020) 1600,3047.53 1724.79,3172.32 1737.32,3172.32 v1(1740,3175)
NetB1_8: B1.8 TMUX3.1 | length 2159
  Top Layer w6: B1.8 1828.24,3010 1926.21,3010 1931.21,3005 v1(1935,3005) ; v1(1815,2750) 1815,2615.15 2028.21,2401.95 2028.21,2386.95 2154,2261.15 2154,2255.85 2183.85,2226 2188.9,2226 2207,2207.9 2207,2189.47 2201.53,2184 2201.53,2166.53 v1(2200,2165) ; v1(2602.8,2199.74) 2602.8,2202.22 2615,2214.42 v1(2615,2335)
  Bottom Layer w6: v1(1815,2750) 1873.26,2808.26 1873.26,2818.26 1928.84,2873.84 1938.84,2873.84 1960,2895 1960,2980 v1(1935,3005) ; v1(2200,2165) 2200,2145 2222,2123 2222,2120.47 2367.47,1975 2507.53,1975 2580,2047.47 2580,2190 2587.06,2197.06 2600.13,2197.06 v1(2602.8,2199.74) ; v1(2615,2335) 2618.79,2335 2623.79,2340 2657.13,2340 2662.13,2345 TMUX3.1
NetB1_9: B1.9 TMUX3.16 | length 5559.8
  Top Layer w6: v1(555,3220) 575,3240 1091.49,3240 1095,3236.49 1095,3230 1196.96,3128.04 1489.34,3128.04 1515.3,3154 1637.74,3154 1670.41,3121.34 1689.07,3121.34 B1.9 ; v1(2535,1775) 2570,1775 2575,1780 2575,1966 2646.32,2037.32 2662.32,2037.32 v1(2665,2040)
  Bottom Layer w6: v1(555,3220) 521.5,3186.5 281.5,3186.5 250,3155 250,2035 495,1790 2520,1790 v1(2535,1775) ; TMUX3.16 2664,2112.66 2664,2041 v1(2665,2040)
NetB1_10: B1.10 TMUX3.15 | length 5863.1
  Top Layer w6: v1(595,3210) 1055,3210 1152.96,3112.04 1495.97,3112.04 1521.93,3138 1631.12,3138 1663.78,3105.34 1677.23,3105.34 B1.10 ; v1(2645,1760) 2645,1833.89 2642,1836.89 2642,1916.9 2735.32,2010.22 2735.32,2022.32 v1(2738,2025)
  Bottom Layer w6: v1(595,3210) 595,3212.53 564.53,3243 308,3243 225,3160 225,1920 485,1660 2545,1660 v1(2645,1760) ; TMUX3.15 2688.58,2074.42 2703,2060 v1(2738,2025)
NetB1_11: B1.11 TMUX4.1 | length 6830.4
  Top Layer w6: v1(540,1280) 525,1265 425,1265 280,1410 280,2410 435,2565 1262.47,2565 v1(1448.74,2751.26) ; v1(1517.42,2842.58) 1517.42,2843.61 1532.46,2858.65 1532.46,3057.46 v1(1535,3060) ; v1(1623.29,3113.29) 1623.29,3112.34 1636.25,3099.38 1636.25,3093.75 1646.53,3083.47 1671.39,3083.47 1714.38,3040.48 B1.11 ; v1(2780,1860) 2983,2063 2983,2201.84 2975,2209.84 v1(2975,2310)
  Bottom Layer w6: v1(540,1280) 760,1060 2540,1060 2725,1245 v1(2725,1725) 2780,1780 v1(2780,1860) ; v1(1448.74,2751.26) 1452.52,2751.26 1461.82,2760.56 1470.56,2760.56 1527.24,2817.24 1527.24,2828.97 1517.42,2838.79 v1(1517.42,2842.58) ; v1(1535,3060) 1555,3080 1555,3088.49 1581.51,3115 1621.59,3115 v1(1623.29,3113.29) ; v1(2975,2310) 2978.79,2310 2987.75,2318.96 3007.02,2318.96 3012.87,2324.82 TMUX4.1
NetB1_20: B1.20 TMUX6.15 | length 8366.4
  Top Layer w6: B1.20 1780.04,2828.28 1778.94,2828.28 1773.01,2822.35 1762.24,2822.35 1738.45,2846.14 1576.14,2846.14 1128.64,2398.64 868.63,2398.64 725,2255 725,1638.51 1215.51,1148 1567,1148 1915,800 1915,175 2040,50 3790,50 3990,250 3990,1955 v1(3925,2020)
  Bottom Layer w6: TMUX6.15 3741.96,2109.93 3741.96,2079.24 3801.2,2020 v1(3925,2020)
NetB1_21: B1.21 TMUX4.15 | length 2216.3
  Top Layer w6: B1.21 1812.92,2832.22 1836.71,2856.01 1847.48,2856.01 1898.72,2804.77 1898.72,2698.03 2100,2496.74 2100,2337.78 2170,2267.78 2170,2262.47 2190.47,2242 2195.53,2242 2223,2214.53 2223,2155.47 2222,2154.47 2222,2120.47 2223,2119.47 2223,1872 2220,1869 v1(2220,1850) ; v1(2755,1890) 2960,2095 v1(2960,2115)
  Bottom Layer w6: v1(2220,1850) 2715,1850 v1(2755,1890) ; v1(2960,2115) 2980.65,2094.35 2980.65,2089.6 3005.26,2065 3025,2065 3038.46,2078.46 TMUX4.15
NetB1_22: B1.22 TMUX2.15 | length 1033.4
  Top Layer w6: B1.22 1787.49,2780.05 1787.49,2620.04 2012.21,2395.32 2012.21,2380.32 2138,2254.53 2138,2244.37 v1(2183.69,2198.69)
  Bottom Layer w6: v1(2183.69,2198.69) 2185,2200 2325,2200 2338.7,2186.3 TMUX2.15
NetB1_27: B1.27 TMUX2.16 | length 880.1
  Top Layer w6: B1.27 1965.37,2818.3 2010,2773.67 2010,2609.37 2116,2503.37 2116,2364 2197.87,2282.13 2197.87,2262.29 2245,2215.15 v1(2245,2130)
  Bottom Layer w6: v1(2245,2130) 2261.34,2113.66 TMUX2.16
NetB1_28: B1.28 TMUX2.1 | length 827.9
  Top Layer w6: B1.28 2026,2784.4 2026,2778.85 2176,2628.85 2176,2349 2213.87,2311.13 2213.87,2274.81 2218.11,2270.57 2218.32,2270.57 2227.64,2261.26 v1(2231.43,2261.26)
  Bottom Layer w6: v1(2231.43,2261.26) 2232.17,2262 2250.43,2262 2253.43,2265 2290,2265 2313.11,2288.11 TMUX2.1
NetB1_29: B1.29 TMUX1.15 | length 1021.5
  Top Layer w6: v1(1920,2455) 1885,2420 1883.51,2420 1883.51,2216.49 1920,2180 1975,2180 v1(1977.5,2177.5) v1@1980,2175 ; B1.29 2042,2796.24 2042,2785.47 2102.47,2725 v1(2135,2725)
  Bottom Layer w6: v1(1920,2455) 1965,2455 2135,2625 v1(2135,2725) ; v1(1977.5,2177.5) 1977.5,2173.71 1988.82,2162.39 TMUX1.15
NetB1_30: B1.30 TMUX1.16 | length 976.3
  Top Layer w6: v1(1880,2485) 1850,2455 1850,2180 1905,2125 v1(1905,2122.5) v1@1905,2120 ; B1.30 2065,2801.08 v1(2065,2795)
  Bottom Layer w6: v1(1880,2485) 1945,2485 v1(1970.06,2510.06) 2065,2605 v1(2065,2795) ; v1(1905,2122.5) 1908.79,2122.5 1917.63,2113.66 TMUX1.16
NetB1_37: B1.37 TMUX6.16 | length 3190
  Top Layer w6: B1.37 2273.11,3210 2457.47,3210 2477.47,3230 2690,3230 2792,3332 3668,3332 3950,3050 3950,2880 3655,2585 v1(3655,2185)
  Bottom Layer w6: v1(3655,2185) 3657.68,2182.32 3664.15,2182.32 3712.64,2133.84 TMUX6.16
NetB1_38: B1.38 TMUX6.1 | length 2991.5
  Top Layer w6: B1.38 2275.14,3239.86 2464.71,3239.86 2474.17,3249.32 2679.32,3249.32 2778,3348 3692,3348 3985,3055 3985,2852.53 3700,2567.53 v1(3700,2425)
  Bottom Layer w6: v1(3700,2425) 3700,2423.4 3712.64,2410.77 TMUX6.1
NetB1_44: B1.44 TMUX5.15 | length 3270.9
  Top Layer w6: v1(1705,2510) 1745,2470 v1(1745,2370) ; B1.44 2028.24,3160 2077.23,3160 2083.84,3153.39 2083.84,3149.95 2095,3138.79 v1(2095,3135) ; v1(2730,1830) 2855,1830 v1(3060,2035)
  Bottom Layer w6: v1(1705,2510) 1705,2607.47 1980,2882.47 1980,2967.47 2061.16,3048.63 2061.16,3071.16 2095,3105 v1(2095,3135) ; v1(1745,2370) 1745,2045 1963,1827 2465.5,1827 2468.5,1830 v1(2730,1830) ; v1(3060,2035) 3340.37,2035 3384.61,2079.24 3384.61,2109.93 TMUX5.15
NetB1_45: B1.45 TMUX5.16 | length 8555.3
  Top Layer w6: v1(1735,2520) 1755,2520 1805,2470 v1(1805,2370) 1805,2325 1120,1640 1120,1300 1256,1164 1621,1164 2045,740 2045,225 2130,140 3555,140 3895,480 3895,1875 3775,1995 3390,1995 3330,2055 v1(3330,2075) ; B1.45 2030.4,3190 v1(2140,3190)
  Bottom Layer w6: v1(1735,2520) 1735,2610 1996,2871 1996,2916 2010,2930 2010,2974.85 2069.92,3034.76 2149.76,3034.76 2240,3125 2240,3160 2210,3190 v1(2140,3190) ; v1(3330,2075) 3330,2105.15 3338.51,2113.66 TMUX5.16
NetB1_46: B1.46 TMUX5.1 | length 3744.5
  Top Layer w6: B1.46 2079.62,3267.05 2084.31,3267.05 2181.25,3364 3698.63,3364 4001,3061.63 4001,2478.35 3652.65,2130 3510,2130 v1(3435,2205)
  Bottom Layer w6: TMUX5.1 3362.76,2277.24 v1(3435,2205)
NetB1_47: B1.47 TMUX4.16 | length 4246.1
  Top Layer w6: B1.47 v1(2082.26,3297.53) ; v1(2920,3250) 3065,3250 v1(3075,3260) ; v1(3330,2190) 3355,2190 3435,2110 3865,2110 4040,2285 v1(4040,3030) ; v1(3645,3210) 3740,3210 v1(3755,3195)
  Bottom Layer w6: v1(2082.26,3297.53) 2335.68,3297.53 2383.89,3249.32 2919.32,3249.32 v1(2920,3250) ; TMUX4.16 3012.87,2157.87 3045,2190 v1(3330,2190) ; v1(3075,3260) 3358.31,3260 3368.99,3249.32 3605.68,3249.32 v1(3645,3210) ; v1(3755,3195) 3805,3145 4005,3145 4040,3110 v1(4040,3030)
NetB1_48: B1.48 TMUX1.1 | length 2210.5
  Top Layer w6: v1(1265,2945) 1265,2890 v1(1325,2830) ; v1(1630,2480) 1630,2452.47 1752.47,2330 v1(1775,2330) ; v1(1935,3275) 1935,3217.78 1952.78,3200 1952.78,3195.89 B1.48
  Bottom Layer w6: v1(1265,2945) 1265,3013.14 1270,3018.14 1270,3082.5 1240,3112.5 1240,3235 1335,3330 1770,3330 1825,3275 v1(1935,3275) ; v1(1325,2830) 1325,2785 v1(1630,2480) ; v1(1775,2330) 1957.37,2330 1963.23,2335.86 TMUX1.1
S1: HSEC1.31 TMUX5.4 | length 2033.7
  Top Layer w6: HSEC1.31 2830,3056.97 v1(2830,3120)
  Bottom Layer w6: v1(2830,3120) 3045,3335 3555,3335 3695,3195 3695,2850.96 3439.53,2595.48 TMUX5.4
S2: HSEC1.8 TMUX5.5 | length 770.8
  Top Layer w6: HSEC1.8 3205.98,2914.17 3209,2911.15 3209,2676 v1(3255,2630) ; v1(3395,2500) 3440,2500 v1(3465,2475)
  Bottom Layer w6: v1(3255,2630) 3385,2500 v1(3395,2500) ; v1(3465,2475) 3465.06,2474.94 3465.06,2345.06 TMUX5.5
S3: HSEC1.14 TMUX5.6 | length 924.9
  Top Layer w6: v1(3095,2685) 3094.53,2685.47 3094.53,2707 3105,2717.47 v1(3105,2780) ; HSEC1.14 3118,2969.76 v1(3118,2919.22) ; v1(3178.69,2666.31) 3178.69,2616.31 v1(3225,2570) ; v1(3355,2485) 3400,2440 v1(3490,2440)
  Bottom Layer w6: v1(3095,2685) 3160,2685 v1(3178.69,2666.31) ; v1(3105,2780) 3105,2815.4 3114.36,2824.77 3114.36,2871.78 3118,2875.42 v1(3118,2919.22) ; v1(3225,2570) 3270,2570 v1(3355,2485) ; v1(3490,2440) 3490.35,2439.65 3490.35,2345.35 TMUX5.6
S4: HSEC1.20 TMUX5.7 | length 1093.7
  Top Layer w6: HSEC1.20 3017.47,2975.79 v1(3017.47,2917.53) ; v1(3365,2790) 3500,2655 v1(3500,2555)
  Bottom Layer w6: v1(3017.47,2917.53) 3017.47,2895.1 3036.59,2875.99 3036.59,2861.75 3021.51,2846.67 3017.86,2846.67 3004.38,2833.2 3004.38,2812.99 3037.28,2780.09 3058.86,2780.09 3078.95,2760 3092.47,2760 3095.47,2757 3116.85,2757 3148.85,2789 3268.63,2789 3270.63,2787 3344.53,2787 3347.53,2790 v1(3365,2790) ; v1(3500,2555) 3516.3,2538.7 TMUX5.7
S5: HSEC1.26 TMUX5.12 | length 1687
  Top Layer w6: HSEC1.26 2915.68,2969.42 2915.68,2891.46 2911,2886.79 2911,2831.47 2994,2748.47 2994,2571 3008.16,2556.84 3013.16,2556.84 v1(3033.98,2536.02)
  Bottom Layer w6: v1(3033.98,2536.02) 3059.79,2536.02 3086.15,2509.66 3086.15,2476.15 2927,2317 2927,2113 3030,2010 3427.53,2010 3465.12,2047.59 TMUX5.12
S6: HSEC1.34 TMUX5.11 | length 2061.8
  Top Layer w6: v1(2596,2445) 2595,2446 2595,2467.37 2650.63,2523 2708,2523 2730,2545 2730,2645.61 2726.24,2649.37 2726.24,2698.29 2734.14,2706.19 v1(2734.14,2751.86) ; v1(2795,2830) 2795,2974.72 HSEC1.34
  Bottom Layer w6: v1(2596,2445) 2595,2445 2576,2426 2576,2281.7 2644.35,2213.35 2644.35,2151.3 2641.13,2148.08 2641.13,2031.34 2657.47,2015 2715.47,2015 2740.47,1990 3435,1990 3490.71,2045.71 TMUX5.11 ; v1(2734.14,2751.86) 2736.82,2754.54 2736.82,2765.37 2738.06,2766.61 2738.06,2773.06 v1(2795,2830)
S7: HSEC1.1 TMUX5.10 | length 1119.1
  Top Layer w6: HSEC1.1 3300.47,3038.27 3617.32,2721.42 3617.32,2712.68 v1(3620,2710)
  Bottom Layer w6: TMUX5.10 3516.3,2156.3 3623,2263 3623,2603 3620,2606 v1(3620,2710)
S8: HSEC1.7 TMUX6.4 | length 1262.5
  Top Layer w6: HSEC1.7 3205.98,3120.98 3245,3160 3405,3160 v1(3750,2815)
  Bottom Layer w6: v1(3750,2815) 3798,2767 3798,2390.47 3792.98,2385.46 3792.98,2348.57 TMUX6.4
S9: HSEC1.13 TMUX6.5 | length 1463.6
  Top Layer w6: HSEC1.13 3115,3058.5 v1(3115,3145) ; v1(3551.26,3046.26) 3672.53,2925 v1(3760,2925)
  Bottom Layer w6: v1(3115,3145) 3133,3163 3256.89,3163 3266.57,3153.32 3386.68,3153.32 3512.32,3027.68 3532.68,3027.68 v1(3551.26,3046.26) ; v1(3760,2925) 3785,2900 3790,2900 3815,2875 TMUX6.5
S10: HSEC1.19 TMUX6.6 | length 1634.2
  Top Layer w6: HSEC1.19 3023.85,3061.84 3023.85,3128.85 v1(3025,3130) ; v1(3501.76,3095.76) 3505.55,3095.76 3516.32,3085 3740,3085 3835,2990 v1(3835,2950)
  Bottom Layer w6: v1(3025,3130) 3068,3173 3120.37,3173 3126.37,3179 3263.52,3179 3273.2,3169.32 3406.68,3169.32 3480.24,3095.76 v1(3501.76,3095.76) ; v1(3835,2950) 3835,2946.21 3840.59,2940.62 TMUX6.6
S11: HSEC1.25 TMUX6.7 | length 1821.9
  Top Layer w6: HSEC1.25 2925,3057.48 v1(2925,3105) ; v1(3515,3185) 3663,3185 v1(3740,3108)
  Bottom Layer w6: v1(2925,3105) 2925,3155 2991,3221 3100.49,3221 3106.49,3227 3290.65,3227 3300.33,3217.32 3482.68,3217.32 v1(3515,3185) ; v1(3740,3108) 3740,3104.24 3751.56,3092.69 3751.56,3088.44 3880,2960 3880,2389.51 3869.91,2379.42 3869.91,2348.73 TMUX6.7
S_OUT: *2.5 S_OUT.1 | length 1555.9
  Top Layer w6: v1(3745,2580) 3930,2580 v1(3950,2560)
  Bottom Layer w6: S_OUT.1 3665,1655 3950,1940 v1(3950,2560) ; *2.5 3676.65,2601.19 3723.81,2601.19 v1(3745,2580)
SOL_G: HSEC1.33 SOL_G.1 | length 2232.8
  Top Layer w6: SOL_G.1 2210,1445.54 2247,1482.54 2247,2019.53 2268,2040.53 2268,2310.49 2192,2386.49 2192,2903.67 2382.9,3094.57 2780.27,3094.57 2789.69,3085.15 2789.69,3061.84 HSEC1.33
TCK: B1.34 JTAG1.7 | length 1651.5
  Top Layer w6: JTAG1.7 628.26,3048.26 662.5,3048.26 707.74,3093.5 739.26,3093.5 770,3124.24 770,3155.76 800.74,3186.5 839.26,3186.5 870.27,3155.49 870.27,3123.97 901.28,3092.96 1607.19,3092.96 1718.15,2982 1995.44,2982 B1.34
TDI: B1.32 J34.1 JTAG1.3 | length 1937
  Top Layer w6: JTAG1.3 533,2927 672.76,2927 766.5,3020.74 766.5,3052.26 800.74,3086.5 839.26,3086.5 873.5,3052.26 873.5,3020.74 911.2,2983.04 1403.04,2983.04 J34.1 1500,2980 v1(1500,2905) ; v1(1910,2910) 1957.77,2910 1962.77,2915 2006.76,2915 B1.32
  Bottom Layer w6: v1(1500,2905) 1701.16,2905 1706.16,2910 v1(1910,2910)
TDO: B1.31 J34.2 JTAG1.1 | length 1941
  Top Layer w6: v1(1235,3020) 1238.79,3020 1248.79,3030 J34.2 ; v1(1345,2960) 1345,2909.24 v1(1347.24,2907) ; v1(1875,2870) 1892.47,2870 1895.47,2873 1943.4,2873 1968.17,2897.77 1995.05,2897.77 2018.84,2873.98 B1.31
  Bottom Layer w6: JTAG1.1 322.5,3037.5 322.5,2997.5 345,2975 1190,2975 v1(1235,3020) ; v1(1345,2960) 1347.5,2962.5 1347.5,3027.5 J34.2 ; v1(1347.24,2907) 1360.68,2893.56 1360.68,2889.32 1380,2870 v1(1875,2870)
TG1: HSEC1.30 TG1.1 | length 2545.3
  Top Layer w6: TG1.1 2600,650 2600,1010 2604,1014 2604,1901.53 2715,2012.53 2715,2330 2946.26,2561.26 2946.26,2564.22 2959.73,2577.7 2962.7,2577.7 2975,2590 2975,2744.85 2859.53,2860.32 HSEC1.30
TG2: HSEC1.36 TG2.1 | length 2593.6
  Top Layer w6: TG2.1 1340,1680 1605,1945 v1(2155,1945) ; v1(2280,1945) 2412.47,1945 2520.47,2053 2530.53,2053 2573,2095.47 2573,2161.95 2565.69,2169.26 2565.69,2240.32 2567.05,2241.68 2567.05,2504.48 2685.7,2623.12 2685.7,2691.83 2677.16,2700.36 v1(2677.16,2753.99) ; v1(2765.04,2870.04) v1(2765.04,2870.04) HSEC1.36
  Bottom Layer w6: v1(2155,1945) v1(2280,1945) ; v1(2677.16,2753.99) 2677.16,2782.16 v1(2765.04,2870.04)
TMS: B1.33 JTAG1.5 | length 1643.4
  Top Layer w6: JTAG1.5 520,3034.54 550,3004.54 v1(550,2950) ; v1(1905,2940) 1949.19,2940 1959.19,2950 1999.6,2950 B1.33
  Bottom Layer w6: v1(550,2950) 578,2922 1274.53,2922 1282.53,2930 1347.53,2930 1357.53,2940 v1(1905,2940)
pads on no net: B1.12 B1.13 B1.14 B1.15 B1.16 B1.17 B1.18 B1.19 B1.23 B1.24 B1.25 B1.26 B1.35 B1.36 B1.39 B1.40 B1.41 B1.42 B1.43 HSEC1. HSEC1.P1 HSEC1.P2 J5.MH1 J5.MH2 JTAG1.2 JTAG1.6 JTAG1.10 JTAG1.12 JTAG1.13 JTAG1.14

## Polygon pours and split planes (outlines as drawn)
GND on Top Layer "GND_L01_P001" (solid, remove dead copper, pour order 1): 10,-10 10,3370 20,3380 4100,3380 4100,-10 4095,-15
Net1_5 on Top Layer "NET1_5_L01_P000" (solid, remove dead copper, pour order 0): 370,825 310,825 255,770 255,655 300,610 695,610 705,620 947.89,620 947.89,715 780,715 675,820
GND on Bottom Layer "GND_L04_P002" (solid, remove dead copper, pour order 2): 15,3380 5,3370 5,-10 4095,-10 4105,0 4105,3385
+5 on +5V (split plane): 4069.9,20.1 20.1,20.1 20.1,3364.9 4069.9,3364.9
GND on GND (split plane): 4069.9,20.1 20.1,20.1 20.1,3364.9 4069.9,3364.9

## Silkscreen, mask and mechanical layers (free items; w line width, h text height)
Mechanical 1:
  lines w10: 5,3380 5,5 10,0 4090,0 4090,3385 10,3385

## Text inside footprints (layer, text, board x,y; h text height)
HSEC1: Mechanical 13 "PCB EDGE" at 3074.19,3372.42 h24.03 r180